# Altium PCB CIBLE_Main.PcbDoc
Units mil, origin at the board's own origin, x right, y up, seen from the top; angles counter-clockwise.
Board outline 1811.02 x 3543.31 mil, 2 copper layers (Top Layer, Bottom Layer); 29 components, 31 nets, 123 pads, 9 vias.
Unrouted connection lines stored in the file: 24.
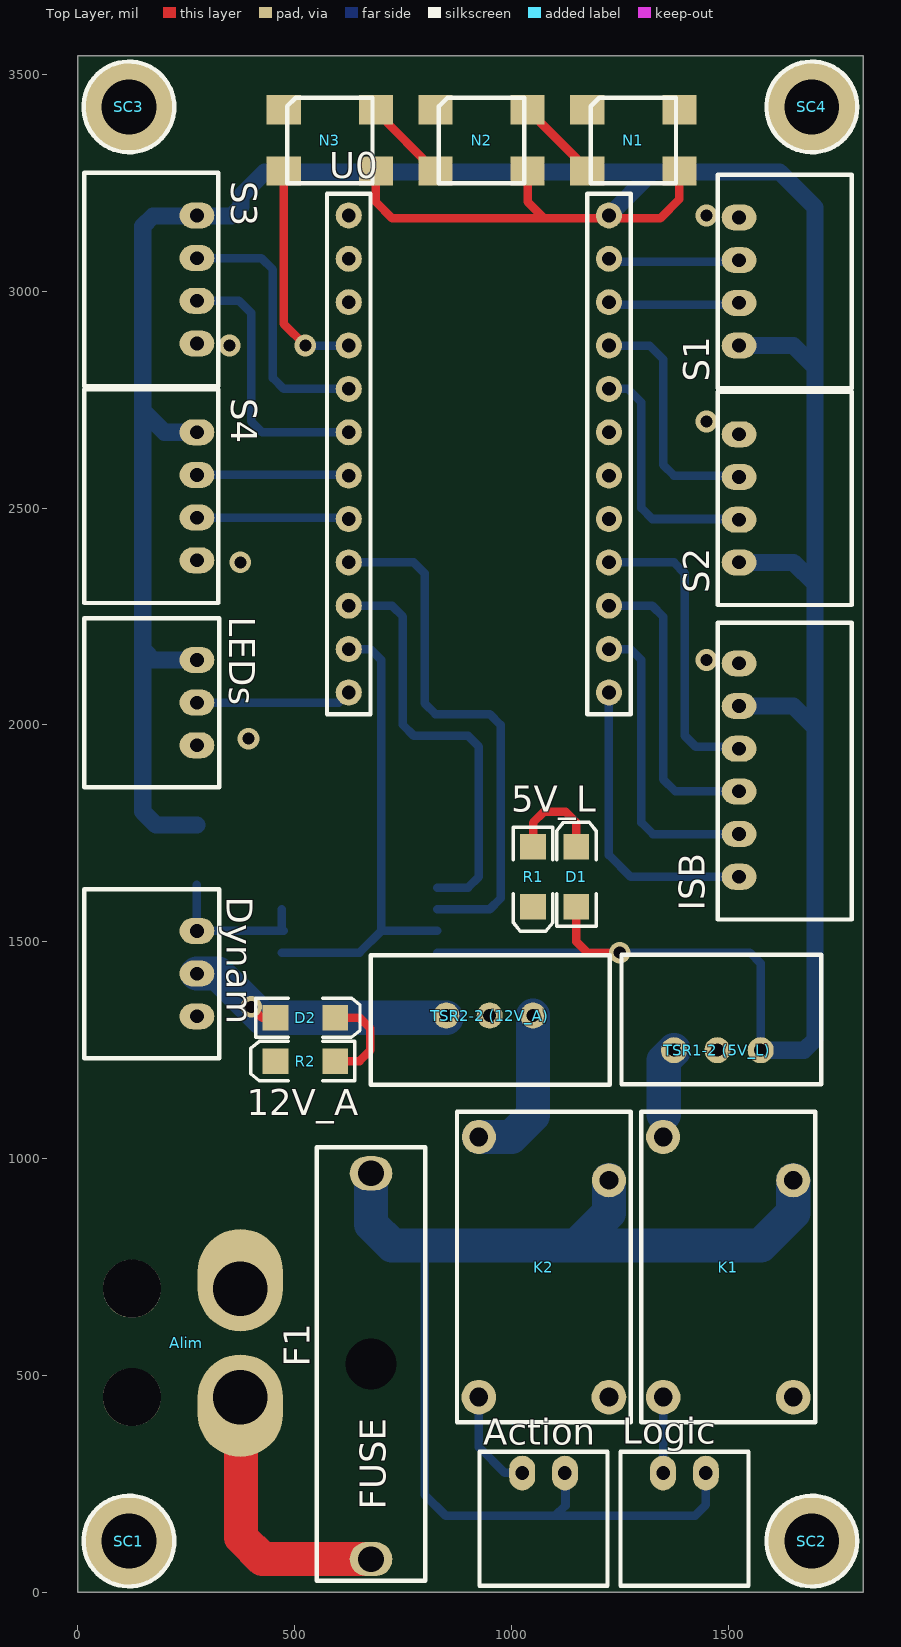
[diagram p0: Top Layer view]
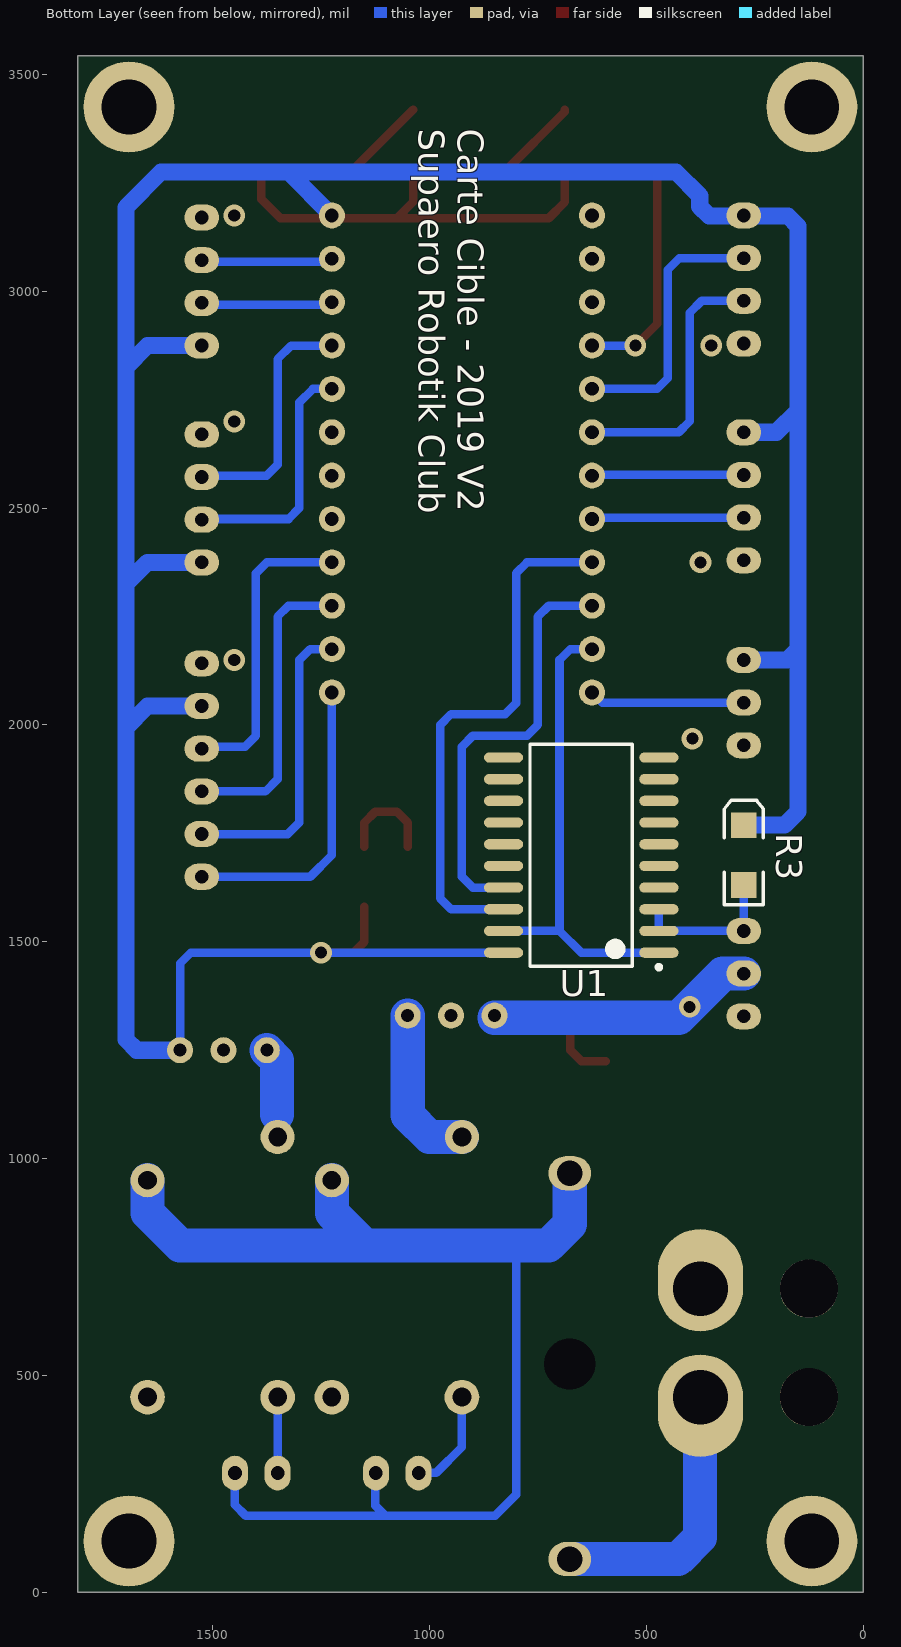
[diagram p1: Bottom Layer view, seen from below]

## Layer stack, top to bottom
Top Solder: solder mask 0.4, Solder Resist, Dk 3.5
Top Layer: signal copper 1.4
Dielectric 1: dielectric 12.6, FR-4, Dk 4.8
Bottom Layer: signal copper 1.4
Bottom Solder: solder mask 0.4, Solder Resist, Dk 3.5

## Board outline
0,0 1811.02,0 1811.02,3543.31 0,3543.31

## Design rules (kind name [scope] priority, off if disabled: settings)
Clearance [All] p1: gap=10 except(30: Arc-Poly Track-Poly SMDPad-Poly THPad-Poly Via-Poly Fill-Poly Poly-Poly Poly-Region Poly-Text)
ComponentClearance ComponentClearance_RD [HasFootprint('3.2X1.6X1.1') vs HasFootprint('3.2X1.6X1.1')] p1: gap=0 collisioncheckmode=3 verticalgap=0 showdistances=FALSE
ComponentClearance ComponentClearance_1 [All] p2: gap=10 collisioncheckmode=3 verticalgap=10 showdistances=FALSE
PolygonConnect [All] p1: connectstyle=Relief reliefconductorwidth=20 reliefentries=4 polygonreliefangle="90 Angle" airgapwidth=10
RoutingVias [All] p1: holewidth=28 width=50 viastyle="Through Hole" minholewidth=28 minwidth=50 maxholewidth=28 maxwidth=50
SolderMaskExpansion [All] p1: expansion=4
Width [All] p1: maxlimit=78.74 minlimit=9.84 preferedwidth=19.68
29 further rules are at their usual default settings.

## Components (designator, comment, footprint, x,y, rotation, side; value= is the part's Value field where it differs from the comment)
Action "Action" "Molex SPOX 2x1H" 1025,275 r0 top
Alim "Header 2H" "Battery SALE" 375,450 r90 top
D1 "LED2" 3.2X1.6X1.1 1150,1650 r90 top
D2 "LED2" 3.2X1.6X1.1 525,1325 r0 top
Dynam "Header 3H" "Molex SPOX 3x1H" 275,1525 r270 top
F1 "Fuse 1" Fuse 676.38,76.38 r90 top
ISB "Header 6H" "MOLEX SPOX 6X1H" 1525,1650 r90 top
K1 "Relay-SPST" Relay 1500,750 r180 top
K2 "Relay-SPST" Relay 1075,750 r180 top
LEDs "Header 3H" "Molex SPOX 3x1H" 275,2150 r270 top
Logic "Logic" "Molex SPOX 2x1H" 1350,275 r0 top
N1 "NeoPixel" Neopixel 1175,3418.7 r0 top
N2 "NeoPixel" Neopixel 825,3418.7 r0 top
N3 "NeoPixel" Neopixel 475,3418.7 r0 top
R1 "Res2" 3.2X1.6X1.1 1050,1650 r270 top
R2 "Res2" 3.2X1.6X1.1 525,1225 r180 top
R3 "Res2" 3.2X1.6X1.1 275,1700 r90 bottom
S1 "Header 4H" "Molex SPOX 4x1H" 1525,2875 r90 top
S2 "Header 4H" "Molex SPOX 4x1H" 1525,2375 r90 top
S3 "Header 4H" "Molex SPOX 4x1H" 275,3175 r270 top
S4 "Header 4H" "Molex SPOX 4x1H" 275,2675 r270 top
SC1 "Screw M3" "Screw M3" 118.11,118.11 r0 top
SC2 "Screw M3" "Screw M3" 1692.91,118.11 r0 top
SC3 "Screw M3" "Screw M3" 118.11,3425.2 r0 top
SC4 "Screw M3" "Screw M3" 1692.91,3425.2 r0 top
"TSR1-2 (5V_L)" "TSR 1-2450" TRS 1375,1250 r180 top
"TSR2-2 (12V_A)" "TSR 2-24120" "TRS - CENTERED" 1050,1330 r0 top
U0 "Teensy2.0" Teensy2.0 625,3175 r0 top locked
U1 "SN74LS241DW" DW020_N 650,1700 r0 bottom

## Footprints (in the part's own frame and the unit in brackets; to place one, negate y for a bottom-side part, rotate by r counter-clockwise, add the part's x,y. Pads: shape width x height; smd on the part's side, far side on the other; paste and mask are expansions set on the pad)
3.2X1.6X1.1 [mm] "SMT LED; 2 Flat Leads"
  rect 1.5x1.5 smd: 1(-1.75,0) 2(1.75,0)
  silkscreen extent -2.9,-1.15 3.2,1.15
"Battery SALE" [mm] "Connecteur Batterie"
  round 3.4 hole 3.4: 0(0,6.35) 0(6.35,6.35)
  oval 6x5 hole 3.2 copper offset -0.5,0: 1(0,0)
  oval 6x5 hole 3.2 copper offset 0.5,0: 2(6.35,0)
DW020_N [mm] "SOIC, 20-Leads, Body 12.8x7.5mm, Pitch 1.27mm, IPC Medium Density"
  oval 2.3x0.6 smd: 1(-4.55,5.715) 2(-4.55,4.445) 3(-4.55,3.175) 4(-4.55,1.905) 5(-4.55,0.635) 6(-4.55,-0.635) 7(-4.55,-1.905) 8(-4.55,-3.175) 9(-4.55,-4.445) 10(-4.55,-5.715) 11(4.55,-5.715) 12(4.55,-4.445) 13(4.55,-3.175) 14(4.55,-1.905) 15(4.55,-0.635) 16(4.55,0.635) 17(4.55,1.905) 18(4.55,3.175) 19(4.55,4.445) 20(4.55,5.715)
  silkscreen extent -4.67,-6.5 3,6.69, body extent -3.75,-6.5 3.75,6.5, height 2.65
Fuse [mm] "Porte-fusible monté sur circuit 10 (UL) A, 6.3 (VDE) A, fusible Cartouche, 893-0574"
  round 2 hole 3: 0(11.43,0)
  oval 2x2.5 hole 1.5: 1(0,0) 2(22.6,0)
  silkscreen extent -1.27,-3.17 24.13,3.18, body extent -1.27,-4.29 24.13,4.29, height 11.41
"Molex SPOX 2x1H" [mil] "Prise CI, Molex, 3 Contacts, 1 rangée, entraxe 2.5mm, 3A, Coudé, ref 22-03-5035"
  oval 60x80 hole 31.5: 1(0,0) 2(98.43,0)
  silkscreen extent -98,-260 197,49, body extent -98,-262 193,49, height 193
"Molex SPOX 3x1H" [mil] "Prise CI, Molex, 3 Contacts, 1 rangée, entraxe 2.5mm, 3A, Coudé, ref 22-03-5035"
  oval 60x80 hole 31.5: 1(0,0) 2(98.43,0) 3(196.85,0)
  silkscreen extent -96,-260 293,51, body extent -96,-260 293,51, height 193
"Molex SPOX 4x1H" [mil] "Prise CI, Molex, 3 Contacts, 1 rangée, entraxe 2.5mm, 3A, Coudé, ref 22-03-5035"
  oval 60x80 hole 31.5: 1(0,0) 2(98.43,0) 3(196.85,0) 4(295.28,0)
  silkscreen extent -98,-260 394,49, body extent -98,-262 390,49, height 193
"MOLEX SPOX 6X1H" [mil] "MOLEX SPOX 6X1H, 22-05-7065"
  oval 60x80 hole 31.5: 1(0,0) 2(98.43,0) 3(196.85,0) 4(295.28,0) 5(393.7,0) 6(492.13,0)
  silkscreen extent -98,-260 586,49, body extent -95,-260 590,51, height 193
Neopixel [mm]
  rect 2x1.7 smd: 1(0,0) 2(0,-3.6) 3(5.4,-3.6) 4(5.4,0)
  silkscreen extent 0.2,-4.3 5.2,0.7, body extent 0.19,-4.33 5.19,0.67, height 2
Relay [mm] "SPST-NO Relay"
  round 2 hole 1.1: 1(3.81,-7.62) 2(-3.81,-5.08)
  round 2.032 hole 1.1: 3(-3.81,7.62) 4(3.81,7.62)
  silkscreen extent -5.09,-9.09 5.09,9.09, body extent -5.08,-9.14 5.08,9.14, height 15
"Screw M3" [mm] "M3 iso Screw"
  round 5.32 hole 3.2 unplated: 0(0,0)
  silkscreen extent -2.66,-2.66 2.66,2.66
Teensy2.0 [mil] "Teensy2.0 with minimal"
  round 60 hole 31.5: 1(0,0) 2(0,-100) 3(0,-200) 4(0,-300) 5(0,-400) 6(0,-500) 7(0,-600) 8(0,-700) 9(0,-800) 10(0,-900) 11(0,-1000) 12(0,-1100) 18(600,-1100) 19(600,-1000) 20(600,-900) 21(600,-800) 22(600,-700) 23(600,-600) 24(600,-500) 25(600,-400) 26(600,-300) 27(600,-200) 28(600,-100) 29(600,0)
  silkscreen extent -50,-1150 650,50, body extent -50,-1150 650,50, height 256
TRS [mil]
  round 60 hole 30: 1(0,0) 2(-100,0) 3(-200,0)
  silkscreen extent -340,-220 121,79, body extent -341,-218 120,78, height 398
"TRS - CENTERED" [mil]
  round 60 hole 30: 1(0,0) 2(-100,0) 3(-200,0)
  silkscreen extent -374,-160 177,139, body extent -374,-157 177,138, height 398

## Part data
Action Logic: library part "Header 2H", "Header, 2-Pin, Right Angle"
Alim: "Header, 2-Pin, Right Angle"
D1 D2: "Typical RED, GREEN, YELLOW, AMBER GaAs LED"
Dynam LEDs: "Header, 3-Pin, Right Angle"
F1: "Fuse"
ISB: "Header, 6-Pin, Right Angle"
K1 K2: "Single-Pole Single-Throw Relay"
R1 R2 R3: "Resistor"
S1 S2 S3 S4: "Header, 4-Pin, Right Angle"
"TSR1-2 (5V_L)" "TSR2-2 (12V_A)": library part "Volt Reg", "Voltage Regulator"
U0: "Teensy 2.0 with minimal pinout"
U1: "Octal Buffer and Line Driver with 3-State Outputs"

## Via types
v1: diameter 50, hole 28, Top Layer to Bottom Layer, 9 vias

## Nets (pads, with @x,y where several pads share a name; then routed paths per layer and width w, separated by ;. In a path a pad name is that pad's centre, name@x,y a point inside that pad or via, vN(x,y) a via of type N, cw(c..) or ccw(c..) an arc to the next point about the centre after c; other vN are vias at no path point)
5V_L: "TSR1-2 (5V_L).3" D1.1 ISB.5 LEDs.1 N1.3 N2.3 N3.3 R3.2 S1.1 S2.1 S3.1 S4.1 U0.29 U1.20 | length 8327.1
  Top Layer w19.68: N3.3 687.6,3206.1 725,3168.7 1075,3168.7 ; N2.3 1037.6,3206.1 1075,3168.7 ; D1.1 1150,1500 1175,1475 v1(1250,1475) ; N1.3 1387.6,3212.6 1343.7,3168.7 1075,3168.7
  Bottom Layer w19.68: U1.20 v1(1250,1475) 1550,1475 1575,1450 1575,1250
  Bottom Layer w39.37: 156.1,2168.9 175,2150 LEDs.1 ; R3.2 181.1,1768.9 150,1800 150,2725 ; S4.1 200,2675 150,2725 ; U0.29 1325,3275 1618.7,3275 1700,3193.7 1700,1275 1675,1250 1575,1250 ; 1318.7,3275 431.3,3275 376.57,3220.28 376.57,3195.28 354.72,3173.43 173.43,3173.43 150,3150 150,2725 ; ISB.5 1650,2043.7 1700,1993.7 ; S2.1 1650,2375 1700,2325 ; S1.1 1650,2875 1700,2825
12V_A: "TSR2-2 (12V_A).3" D2.1 Dynam.2 | length 683.5
  Top Layer w19.68: v1(400,1350) 425,1325 D2.1
  Bottom Layer w78.74: Dynam.2 323.43,1426.57 v1(400,1350) 425,1325 850,1325
DYN_CTRL: U0.11 U1.1 U1.19 | length 1089.3
  Bottom Layer w19.68: U1.1 650,1475 700,1525 ; U0.11 675,2175 700,2150 700,1525 ; U1.19 700,1525
DYN_DATA: Dynam.1 R3.1 U1.2 U1.3 | length 356.1
  Bottom Layer w19.68: R3.1 Dynam.1 U1.2@475,1525 ; U1.2 U1.3
DYN_RX: U0.9 U1.18 | length 1237.3
  Bottom Layer w19.68: U0.9 775,2375 800,2350 800,2050 825,2025 950,2025 975,2000 975,1600 950,1575 U1.18
DYN_TX: U0.10 U1.17 | length 987.3
  Bottom Layer w19.68: U0.10 725,2275 750,2250 750,2000 775,1975 900,1975 925,1950 925,1650 900,1625 U1.17
GND: "TSR1-2 (5V_L).2" "TSR2-2 (12V_A).2" Alim.2 Dynam.3 ISB.6 K1.3 K2.3 LEDs.3 N1.1 N2.1 N3.1 R1.2 R2.2 S1.4 S2.4 S3.4 S4.4 U0.1 U1.10
  other v1: 393.7,1968.5 1450,2150 375,2375 1450,2700 350,2875 1450,3175
ISB_CLK: ISB.2 U0.19 | length 696.4
  Bottom Layer w19.68: U0.19 1275,2175 1300,2150 1300,1775 1326.57,1748.43 ISB.2
ISB_DATA: ISB.4 U0.21 | length 697.7
  Bottom Layer w19.68: U0.21 1375,2375 1400,2350 1400,1975 1425,1950 1520.28,1950 ISB.4
ISB_LATCH: ISB.3 U0.20 | length 697
  Bottom Layer w19.68: U0.20 1325,2275 1350,2250 1350,1875 1378.15,1846.85 ISB.3
ISB_NEO: ISB.1 U0.18 | length 695.7
  Bottom Layer w19.68: U0.18 1225,1700 1275,1650 ISB.1
LEDS: LEDs.2 U0.12 | length 359.7
  Bottom Layer w19.68: LEDs.2 601.57,2051.57 U0.12
NEOPIXEL: N3.2 U0.4 | length 522.7
  Top Layer w19.68: N3.2 475,2925 v1(525,2875)
  Bottom Layer w19.68: v1(525,2875) U0.4
NetAction_1: Action.1 K2.4 | length 239.1
  Bottom Layer w19.68: K2.4 925,334.84 984.25,275.59 Action.1@1024.41,275.59
NetD1_2: D1.2 R1.1 | length 232.9
  Top Layer w19.68: R1.1 1050,1775 1075,1800 1125,1800 1150,1775 D1.2
NetD2_2: D2.2 R2.1 | length 232.9
  Top Layer w19.68: R2.1 650,1225 675,1250 675,1300 650,1325 D2.2
NetK1_4: K1.4 Logic.1 | length 175
  Bottom Layer w19.68: Logic.1 K1.4
NetN1_3: N1.2 N2.4 | length 198.6
  Top Layer w19.68: N2.4 1175,3281.3 N1.2
NetN2_3: N2.2 N3.4 | length 198.6
  Top Layer w19.68: N3.4 687.6,3414.37 N2.2
S1_ECHO: S1.3 U0.28 | length 309.1
  Bottom Layer w19.68: U0.28@1225,3068.7 1503.15,3068.7 S1.3@1525,3090.55
S1_TRIG: S1.2 U0.27 | length 309.7
  Bottom Layer w19.68: U0.27@1225,2968.7 1501.57,2968.7 S1.2@1525,2992.13
S2_ECHO: S2.3 U0.26 | length 576.1
  Bottom Layer w19.68: U0.26@1225,2868.7 1231.3,2875 1318.7,2875 1350,2843.7 1350,2600 1375,2575 1509.45,2575 S2.3@1525,2590.55
S2_TRIG: S2.2 U0.25 | length 576.7
  Bottom Layer w19.68: U0.25@1225,2768.7 1231.3,2775 1268.7,2775 1300,2743.7 1300,2500 1325,2475 1507.87,2475 S2.2@1525,2492.13
S3_ECHO: S3.3 U0.6 | length 622
  Bottom Layer w19.68: S3.3 371.85,2978.15 400,2950 400,2700 425,2675 U0.6
S3_TRIG: S3.2 U0.5 | length 621.4
  Bottom Layer w19.68: S3.2 423.43,3076.57 450,3050 450,2800 475,2775 U0.5
S4_ECHO: S4.3 U0.8 | length 351.3
  Bottom Layer w19.68: S4.3 621.85,2478.15 U0.8
S4_TRIG: S4.2 U0.7 | length 350.7
  Bottom Layer w19.68: S4.2 623.43,2576.57 U0.7
V_BAT: Alim.1 F1.1 | length 1288.7
  Top Layer w78.74: Alim.1@376.38,450 376.38,126.38 426.38,76.38 F1.1
  Bottom Layer w78.74: Alim.1@376.38,450 376.38,126.38 426.38,76.38 F1.1
V_BAT_A: "TSR2-2 (12V_A).1" K2.1 | length 375.7
  Bottom Layer w78.74: K2.1 1000,1050 1050,1100 1050,1330
V_BAT_L: "TSR1-2 (5V_L).1" K1.1 | length 158.4
  Bottom Layer w78.74: 1351.38,1101.38 1351.38,1226.38 1375,1250
V_BAT_P: Action.2 F1.2 K1.2 K2.2 Logic.2 | length 2835.5
  Bottom Layer w19.68: 800,800 800,225 848.62,176.38 1423.43,176.38 ; 1101.38,176.38 1124.8,199.8 Action.2@1124.8,276.38 ; 1423.43,176.57 1448.43,201.57 Logic.2
  Bottom Layer w78.74: F1.2 676.38,848.62 725,800 800,800 1150,800 ; K2.2 1225,875 1150,800 ; K1.2 1650,875 1575,800 1150,800
pads on no net: Alim.0 F1.0 N1.4 SC1.0 SC2.0 SC3.0 SC4.0 U0.2 U0.3 U0.22 U0.23 U0.24 U1.4 U1.5 U1.6 U1.7 U1.8 U1.9 U1.11 U1.12 U1.13 U1.14 U1.15 U1.16

## Silkscreen, mask and mechanical layers (free items; w line width, h text height)
Top Overlay:
  text "5V_L" at 1000,1800 h60
  text "12V_A" at 390,1100 h60
Bottom Overlay:
  text "Carte Cible - 2019 V2 / Supaero Robotik Club" at 1025,3375 h60 r90
Mechanical 2:
  the board outline again, w10

## Dimensions
118.11,118.11 to 0,0 on Mechanical 15
118.11,118.11 to 0,0 on Mechanical 15
0,0 to 1811.02,0 on Mechanical 15
0,3543.31 to 0,0 on Mechanical 15

## Text inside footprints (layer, text, board x,y; h text height)
F1: Top Overlay "FUSE" at 710,190 h60 r90